# Altium PCB PCB4.PcbDoc (part 5 of 7)
Units mm, origin at the board's own origin, x right, y up, seen from the top; angles counter-clockwise.
Board outline 234.9 x 198.3 mm, 4 copper layers (Top Layer, Signal Layer 2, Mid, Bottom Layer), stack 3.052 mm thick; 410 components, 320 nets, 2032 pads, 297 vias.
Unrouted connection lines stored in the file: 1.
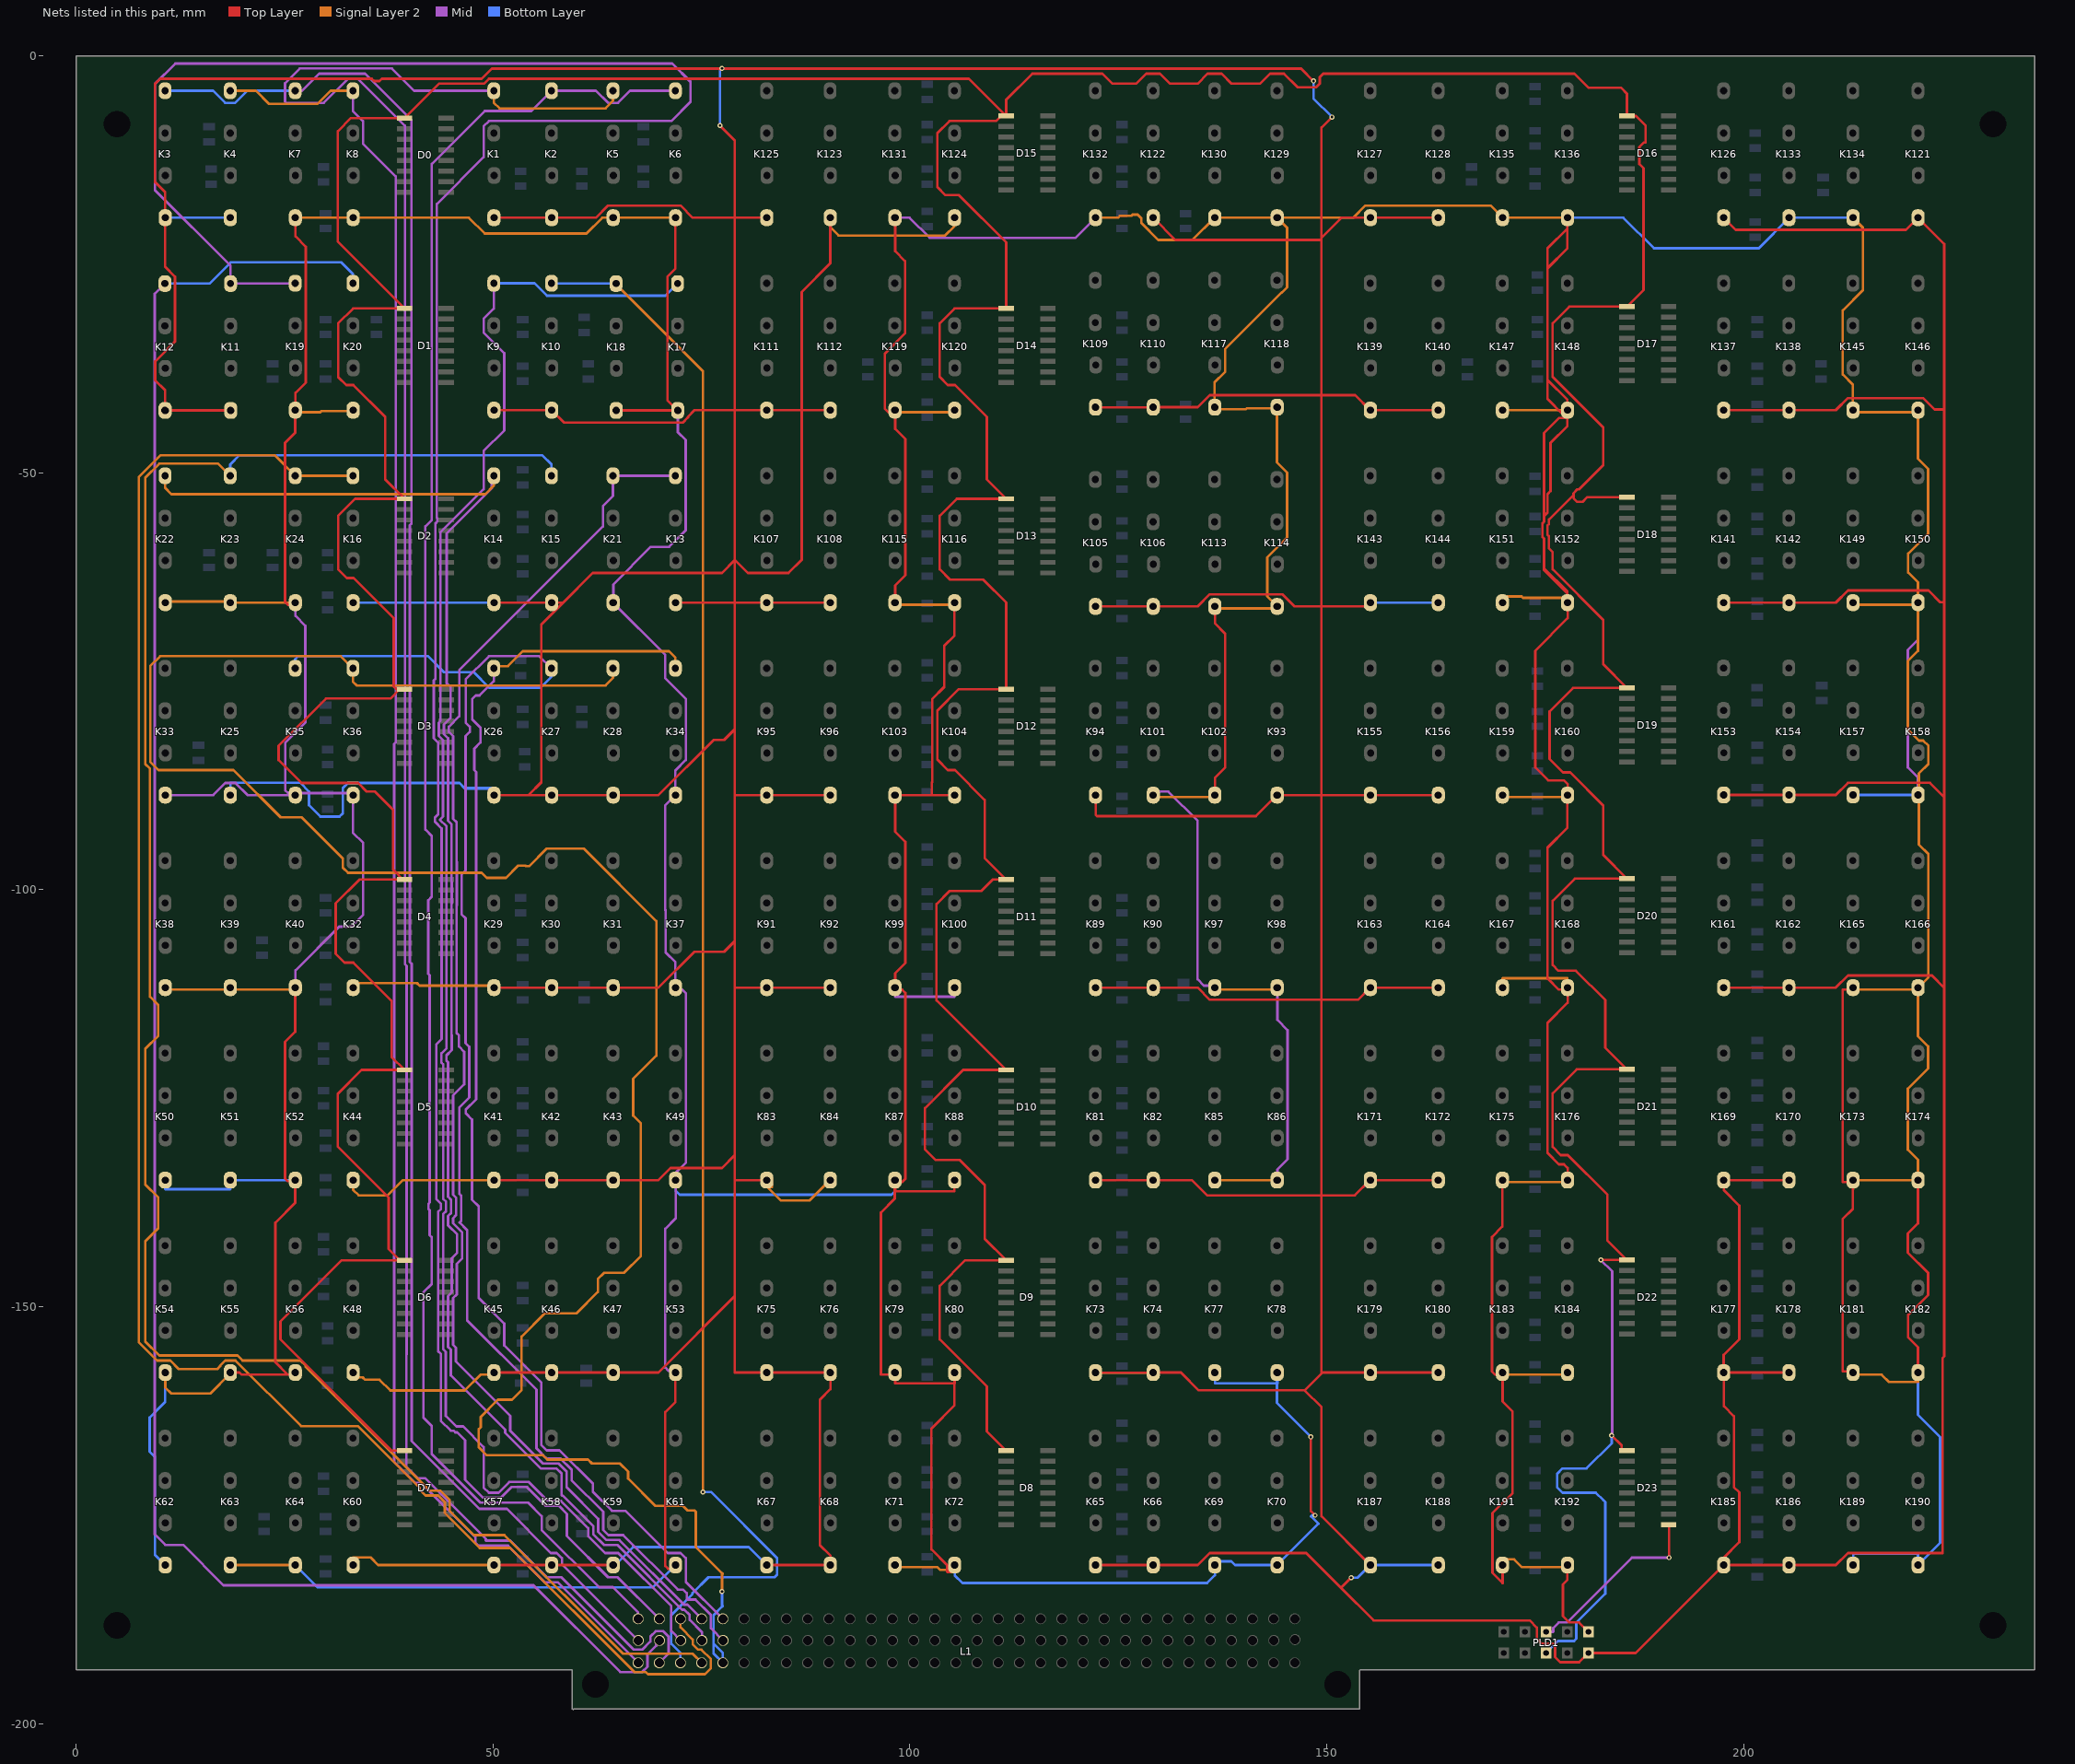
[diagram p7: the nets of this part, all layers, seen from the top]

## Via types
v1: diameter 0.6, hole 0.3, Top Layer to Bottom Layer, 292 vias
v2: diameter 0.7, hole 0.3, Top Layer to Bottom Layer, 5 vias

## Nets (pads, with @x,y where several pads share a name; then routed paths per layer and width w, separated by ;. In a path a pad name is that pad's centre, name@x,y a point inside that pad or via, vN(x,y) a via of type N, cw(c..) or ccw(c..) an arc to the next point about the centre after c; other vN are vias at no path point) (continued)
QS1(DATA): D23.9 PLD1.8 | length 22.7
  Top Layer w0.3: D23.9@190.966,-176.131 191.031,-176.131 v1(191.031,-180.068)
  Mid w0.3: PLD1.8@176.274,-188.958 177.137,-188.958 177.137,-188.501 177.798,-187.841 178.788,-187.841 186.561,-180.068 v1(191.031,-180.068)
STR: D0.1 D1.1 D2.1 D3.1 D4.1 D5.1 D6.1 D7.1 D8.1 D9.1 D10.1 D11.1 D12.1 D13.1 D14.1 D15.1 D16.1 D17.1 D18.1 D19.1 D20.1 D21.1 D22.1 D23.1 PLD1.3 | length 917.8
  Top Layer w0.3: D7.1@39.408,-167.241 37.853,-167.241 24.515,-153.903 24.515,-151.747 31.844,-144.418 D6.1@38.827,-144.418 ; D6.1@39.408,-144.418 D6.1@38.827,-144.418 ; D4.1@39.408,-98.77 D4.1@39.219,-98.77 ; D3.1@39.408,-75.947 D3.1@38.816,-75.947 ; D8.1@111.543,-167.241 109.218,-164.916 109.218,-159.548 103.572,-153.903 103.572,-147.475 106.63,-144.418 D9.1@111.543,-144.418 108.976,-141.85 108.976,-135.38 105.993,-132.397 103.071,-132.397 101.806,-131.132 101.806,-126.164 106.376,-121.594 D10.1@111.543,-121.594 103.192,-113.242 103.192,-101.701 104.753,-100.139 108.542,-100.139 109.911,-98.77 D11.1@111.543,-98.77 108.964,-96.19 108.964,-89.212 105.393,-85.642 104.544,-85.642 103.284,-84.381 103.284,-78.531 105.868,-75.947 D12.1@111.543,-75.947 111.543,-65.554 108.802,-62.812 104.793,-62.812 103.572,-61.592 103.572,-55.165 105.614,-53.123 D13.1@111.543,-53.123 109.218,-50.797 109.218,-43.311 105.393,-39.486 104.544,-39.486 103.572,-38.514 103.572,-32.087 105.36,-30.299 D14.1@111.543,-30.299 111.543,-22.374 105.881,-16.711 104.27,-16.711 103.284,-15.725 103.284,-9.298 104.753,-7.829 110.345,-7.829 110.952,-7.221 D15.1@111.543,-7.221 ; v1(182.852,-144.382) D22.1@185.966,-144.382 183.64,-142.056 183.64,-136.553 178.884,-131.797 178.035,-131.797 177.063,-130.825 177.063,-124.398 179.939,-121.521 D21.1@185.966,-121.521 183.386,-118.941 183.386,-113.221 179.863,-109.699 177.741,-109.699 177.063,-109.021 177.063,-101.32 179.721,-98.662 D20.1@185.966,-98.662 183.132,-95.828 183.132,-89.889 179.169,-85.926 178.32,-85.926 176.69,-84.296 176.69,-78.616 179.504,-75.801 D19.1@185.966,-75.801 183.132,-72.967 183.132,-67.66 177.063,-61.592 177.063,-59.503 176.629,-59.07 176.629,-57.62 176.448,-57.438 176.448,-56.319 176.629,-56.137 176.629,-55.598 179.569,-52.659 ; v1(184.148,-165.424) 185.341,-166.617 185.341,-167.241 D23.1@185.966,-167.241 ; D18.1@185.966,-52.942 181.195,-52.942 180.648,-53.488 180.027,-53.488 179.588,-53.049 179.588,-52.677 179.569,-52.659 ; D3.1@38.816,-75.947 37.701,-77.062 29.967,-77.062 24.29,-82.739 24.29,-84.444 27.042,-87.197 33.834,-87.197 34.85,-88.212 35.828,-88.212 38.033,-90.417 38.033,-97.584 D4.1@39.219,-98.77 ; D3.1@38.816,-75.947 38.415,-75.947 38.098,-75.629 38.098,-67.405 33.306,-62.613 32.457,-62.613 31.436,-61.592 31.436,-55.165 33.478,-53.123 D2.1@39.408,-53.123 37.082,-50.797 37.082,-43.311 33.257,-39.486 32.408,-39.486 31.436,-38.514 31.436,-32.087 33.224,-30.299 D1.1@39.408,-30.299 31.402,-22.293 31.402,-9.044 32.97,-7.475 D0.1@39.408,-7.475 43.535,-3.349 48.908,-3.349 49.508,-2.749 107.07,-2.749 D15.1@111.543,-7.221 ; D6.1@38.827,-144.418 37.492,-143.082 37.492,-136.881 31.402,-130.79 31.402,-124.432 34.24,-121.594 D5.1@39.408,-121.594 37.844,-120.03 37.844,-113.306 33.257,-108.719 32.194,-108.719 31.148,-107.673 31.148,-101.609 33.986,-98.77 D4.1@39.219,-98.77 ; D15.1@111.543,-7.221 111.543,-5.277 114.672,-2.149 123.075,-2.149 124.275,-3.349 127.117,-3.349 128.317,-2.149 129.996,-2.149 131.196,-3.349 134.491,-3.349 135.691,-2.149 137.37,-2.149 138.57,-3.349 141.976,-3.349 143.176,-2.149 144.855,-2.149 146.487,-3.781 148.7,-3.781 149.14,-3.341 149.14,-2.565 149.556,-2.149 179.675,-2.149 181.359,-3.833 185.244,-3.833 185.966,-4.554 D16.1@185.966,-7.221 187.069,-7.221 188.2,-8.353 188.2,-10.421 187.978,-10.421 187.462,-10.937 187.462,-12.993 187.958,-13.489 187.958,-28.09 D17.1@185.966,-30.082 179.068,-30.082 177.063,-32.087 177.063,-38.514 183.132,-44.583 183.132,-49.096 180.239,-51.988 180.027,-51.988 179.569,-52.446 179.569,-52.659
  Mid w0.3: v1(182.852,-144.382) 184.198,-145.728 184.198,-165.373 v1(184.148,-165.424)
  Bottom Layer w0.3: PLD1.3@176.274,-191.498 177.714,-190.059 179.65,-190.059 179.914,-189.795 179.914,-187.858 183.374,-184.398 183.374,-173.408 183.154,-173.188 182.238,-172.272 178.244,-172.272 177.623,-171.652 177.623,-169.993 178.244,-169.373 179.426,-169.373 181.128,-169.373 184.148,-166.352 v1(184.148,-165.424)
X1: K1.1 K2.1 K3.1 K4.1 K9.1 K10.1 K11.1 K12.1 K13.1 K14.1 K15.1 K16.1 K25.1 K26.1 K27.1 K28.1 K29.1 K30.1 K31.1 K32.1 K41.1 K42.1 K43.1 K44.1 K45.1 K46.1 K47.1 K48.1 K57.1 K58.1 K59.1 K60.1 K65.1 K66.1 K67.1 K68.1 K73.1 K74.1 K75.1 K76.1 K81.1 K82.1 K83.1 K84.1 K89.1 K90.1 K91.1 K92.1 K93.1 K94.1 K95.1 K96.1 K105.1 K106.1 K107.1 K108.1 K109.1 K110.1 K111.1 K112.1 K121.1 K122.1 K123.1 K124.1 K125.1 K126.1 K127.1 K128.1 K137.1 K138.1 K139.1 K140.1 K141.1 K142.1 K143.1 K144.1 K153.1 K154.1 K155.1 K156.1 K161.1 K162.1 K163.1 K164.1 K169.1 K170.1 K171.1 K172.1 K177.1 K178.1 K179.1 K180.1 K185.1 K186.1 K187.1 K188.1 PLD1.5 | length 1955.6
  Top Layer w0.3: K4.1@18.491,-19.413 18.491,-19.419 K4.1@18.531,-19.419 ; K11.1@18.58,-42.533 18.58,-42.781 18.54,-42.781 K11.1@18.54,-42.527 10.706,-42.527 K12.1@10.706,-42.533 K12.1@10.666,-42.527 10.681,-42.512 10.681,-40.11 9.494,-38.922 9.494,-36.643 11.878,-34.259 11.878,-26.483 10.681,-25.287 K3.1@10.681,-19.413 10.681,-16.36 9.469,-15.148 9.469,-3.369 10.09,-2.749 35.471,-2.749 35.755,-3.032 36.376,-3.032 36.66,-2.749 48.659,-2.749 49.859,-1.549 v1@77.172,-1.549 ; K60.1@33.208,-180.957 33.208,-180.963 K60.1@33.248,-180.963 ; K16.1@33.208,-65.569 33.208,-65.819 33.248,-65.819 K16.1@33.248,-65.574 ; K57.1@50.099,-180.957 50.099,-180.963 K57.1@50.139,-180.963 50.144,-180.957 K58.1@57.021,-180.957 57.021,-180.963 K58.1@57.061,-180.963 K59.1@64.435,-180.963 ; K26.1@50.099,-88.647 K26.1@50.099,-88.654 ; K45.1@50.139,-157.885 50.144,-157.88 K46.1@57.021,-157.88 ; K41.1@50.139,-134.807 K42.1@57.061,-134.807 K43.1@64.435,-134.807 69.833,-134.807 71.288,-133.352 77.468,-133.352 78.992,-131.828 ; K29.1@50.139,-111.729 50.144,-111.724 K30.1@57.021,-111.724 ; K14.1@50.139,-65.574 K15.1@57.061,-65.574 58.409,-65.574 ; K9.1@50.139,-42.496 K10.1@57.026,-42.496 ; K1.1@50.139,-19.419 50.144,-19.413 K2.1@57.021,-19.413 ; K10.1@57.021,-42.491 K10.1@57.026,-42.496 ; K2.1@57.061,-19.419 K2.1@57.021,-19.413 ; K47.1@64.435,-157.885 K47.1@64.435,-157.88 ; K31.1@64.435,-111.729 K31.1@64.395,-111.724 ; K28.1@64.435,-88.652 K28.1@64.395,-88.647 ; K13.1@71.92,-65.574 K13.1@71.879,-65.569 78.992,-65.569 ; v1(77.214,-8.364) 78.992,-10.142 78.992,-19.413 ; v1(77.468,-1.507) v1@77.468,-1.549 ; K67.1@82.817,-180.957 K68.1@90.422,-180.957 90.422,-180.963 K68.1@90.462,-180.963 90.462,-179.814 89.202,-178.555 89.202,-161.109 90.462,-159.85 K76.1@90.462,-157.885 ; K76.1@90.422,-157.88 82.857,-157.88 K75.1@82.857,-157.885 ; K84.1@90.422,-134.802 90.422,-134.807 K84.1@90.462,-134.807 ; K92.1@90.462,-111.729 90.422,-111.729 K92.1@90.422,-111.724 K91.1@82.817,-111.724 78.992,-111.724 ; K96.1@90.462,-88.652 90.422,-88.652 K96.1@90.422,-88.647 K95.1@82.817,-88.647 78.992,-88.647 ; K108.1@90.462,-65.574 90.422,-65.574 K108.1@90.422,-65.569 K107.1@82.817,-65.569 78.992,-65.569 ; K112.1@90.462,-42.496 90.422,-42.496 K112.1@90.422,-42.491 87.018,-42.491 ; K124.1@105.344,-19.413 105.344,-19.667 105.384,-19.667 K124.1@105.384,-19.419 ; K65.1@122.275,-180.963 129.151,-180.963 K66.1@129.157,-180.957 ; K73.1@122.275,-157.885 129.151,-157.885 K74.1@129.157,-157.88 ; K81.1@122.275,-134.807 129.151,-134.807 K82.1@129.157,-134.802 ; K89.1@122.275,-111.729 129.152,-111.729 K90.1@129.157,-111.724 ; K94.1@122.275,-88.652 122.275,-91.018 122.426,-91.168 141.494,-91.168 K93.1@144.016,-88.647 ; K105.1@122.275,-66.021 129.151,-66.021 K106.1@129.157,-66.015 ; K109.1@122.275,-42.145 129.152,-42.145 K110.1@129.157,-42.139 ; K122.1@129.157,-19.413 129.157,-19.667 129.197,-19.667 K122.1@129.197,-19.453 ; K66.1@129.197,-180.963 K66.1@129.157,-180.957 ; K74.1@129.197,-157.885 129.197,-157.88 132.495,-157.88 134.618,-160.002 147.318,-160.002 ; K82.1@129.197,-134.807 K82.1@129.157,-134.802 ; K90.1@129.197,-111.729 K90.1@129.157,-111.724 ; K106.1@129.197,-66.021 K106.1@129.157,-66.015 ; K110.1@129.197,-42.145 K110.1@129.157,-42.139 ; K93.1@144.056,-88.652 K93.1@144.016,-88.647 ; v1(148.39,-3.03) 146.908,-1.549 v1@77.468,-1.549 ; v1(150.62,-7.348) 149.35,-8.618 149.35,-21.826 ; v1(152.906,-182.471) 151.694,-183.683 ; K188.1@163.339,-180.957 163.339,-180.963 K188.1@163.379,-180.963 ; K144.1@163.339,-65.569 163.339,-65.574 K144.1@163.379,-65.574 ; K180.1@163.379,-157.885 163.339,-157.885 K180.1@163.339,-157.88 K179.1@155.191,-157.88 149.44,-157.88 149.35,-157.97 ; K172.1@163.379,-134.807 163.339,-134.807 K172.1@163.339,-134.802 K171.1@155.191,-134.802 153.359,-136.634 149.35,-136.634 ; K164.1@163.379,-111.729 163.339,-111.729 K164.1@163.339,-111.724 K163.1@155.191,-111.724 153.736,-113.179 149.35,-113.179 ; K156.1@163.379,-88.652 163.339,-88.652 K156.1@163.339,-88.647 K155.1@155.191,-88.647 K155.1@155.232,-88.652 155.191,-88.652 155.186,-88.647 149.35,-88.647 ; K140.1@163.379,-42.496 163.339,-42.496 K140.1@163.339,-42.491 K139.1@155.191,-42.491 153.39,-40.69 149.35,-40.69 ; K128.1@163.379,-19.419 163.339,-19.419 K128.1@163.339,-19.413 K127.1@155.192,-19.413 151.763,-19.413 149.35,-21.826 ; K169.1@197.567,-134.802 K170.1@205.377,-134.802 205.377,-134.807 K170.1@205.417,-134.807 ; K185.1@197.607,-180.963 K185.1@197.567,-180.957 ; K177.1@197.607,-157.885 197.607,-161.905 198.803,-163.101 198.803,-171.61 199.438,-172.245 199.438,-178.212 197.607,-180.043 K185.1@197.607,-180.957 ; K169.1@197.607,-134.807 197.607,-136.031 199.438,-137.863 199.438,-153.883 197.567,-155.755 K177.1@197.567,-157.88 K178.1@205.377,-157.88 205.377,-158.123 205.417,-158.123 K178.1@205.417,-157.885 ; K161.1@197.607,-111.729 K161.1@197.567,-111.724 K162.1@205.377,-111.724 ; K153.1@197.607,-88.626 K153.1@197.567,-88.621 K154.1@205.377,-88.621 ; K141.1@197.607,-65.574 K141.1@197.567,-65.569 K142.1@205.377,-65.569 ; K137.1@197.607,-42.496 K137.1@197.567,-42.491 K138.1@205.377,-42.491 ; K126.1@197.607,-19.419 197.589,-19.436 199.022,-20.869 219.418,-20.869 K121.1@220.873,-19.413 224.026,-22.566 224.026,-42.4 ; K162.1@205.417,-111.729 K162.1@205.377,-111.724 ; K154.1@205.417,-88.626 K154.1@205.377,-88.621 ; K142.1@205.417,-65.574 K142.1@205.377,-65.569 ; K138.1@205.417,-42.496 K138.1@205.377,-42.491 ; K26.1@50.099,-88.654 K26.1@50.139,-88.652 50.144,-88.647 K26.1@50.144,-88.654 ; K26.1@50.099,-88.654 K26.1@50.144,-88.654 ; K26.1@50.144,-88.654 54.252,-88.654 54.259,-88.647 ; 54.259,-88.647 K27.1@57.021,-88.647 K27.1@57.061,-88.652 57.061,-88.647 K28.1@64.395,-88.647 ; 54.259,-88.647 55.801,-87.104 55.801,-68.181 58.409,-65.574 ; K46.1@57.021,-157.88 57.021,-158.123 57.061,-158.123 K46.1@57.061,-157.885 ; K46.1@57.021,-157.88 K46.1@57.061,-157.885 ; K30.1@57.021,-111.724 57.021,-111.971 57.061,-111.971 K30.1@57.061,-111.729 ; K30.1@57.021,-111.724 K30.1@57.061,-111.729 ; K2.1@57.021,-19.413 62.353,-19.413 63.803,-17.964 72.506,-17.964 73.956,-19.413 78.992,-19.413 ; K10.1@57.026,-42.496 58.512,-43.983 72.765,-43.983 73.386,-43.362 73.386,-43.279 74.174,-42.491 78.992,-42.491 ; K46.1@57.061,-157.885 57.061,-157.88 K47.1@64.395,-157.88 K47.1@64.435,-157.88 ; K30.1@57.061,-111.729 57.061,-111.724 K31.1@64.395,-111.724 ; 58.409,-65.574 61.974,-62.009 77.468,-62.009 78.992,-60.485 ; K31.1@64.395,-111.724 69.838,-111.724 74.138,-107.424 77.722,-107.424 78.992,-106.154 ; K28.1@64.395,-88.647 69.838,-88.647 76.46,-82.024 77.722,-82.024 78.992,-80.754 ; K47.1@64.435,-157.88 69.838,-157.88 78.992,-148.726 ; v1@77.172,-1.549 77.214,-1.591 v1@77.256,-1.549 ; v1@77.172,-1.549 v1@77.256,-1.549 ; v1@77.256,-1.549 v1@77.468,-1.549 ; 78.992,-148.726 78.992,-134.802 ; 78.992,-148.726 78.992,-157.88 K75.1@82.817,-157.88 ; 78.992,-134.802 K83.1@82.817,-134.802 ; 78.992,-134.802 78.992,-131.828 ; 78.992,-131.828 78.992,-111.724 ; 78.992,-111.724 78.992,-106.154 ; 78.992,-106.154 78.992,-88.647 ; 78.992,-88.647 78.992,-80.754 ; 78.992,-80.754 78.992,-65.569 ; 78.992,-65.569 78.992,-60.485 ; 78.992,-60.485 79.017,-60.46 ; 78.992,-60.485 78.992,-60.46 ; 78.992,-60.46 79.017,-60.46 ; 78.992,-60.46 78.992,-60.434 ; 78.992,-60.434 78.992,-42.491 ; 78.992,-60.434 79.017,-60.46 ; 78.992,-42.491 K111.1@82.817,-42.491 ; 78.992,-42.491 78.992,-19.413 ; 78.992,-19.413 K125.1@82.817,-19.413 ; 79.017,-60.46 80.566,-62.009 85.443,-62.009 87.018,-60.434 87.018,-42.491 ; K75.1@82.817,-157.88 82.817,-157.885 K75.1@82.857,-157.885 ; K75.1@82.817,-157.88 K75.1@82.857,-157.885 ; K83.1@82.817,-134.802 82.817,-134.807 K83.1@82.857,-134.807 K83.1@82.817,-134.802 ; K111.1@82.817,-42.491 K111.1@82.857,-42.491 ; K111.1@82.817,-42.491 82.817,-42.731 82.857,-42.731 K111.1@82.857,-42.496 ; K111.1@82.817,-42.491 K111.1@82.857,-42.496 ; K125.1@82.817,-19.413 82.817,-19.667 82.857,-19.667 K125.1@82.857,-19.419 K125.1@82.817,-19.413 ; K111.1@82.857,-42.496 K111.1@82.857,-42.491 ; K111.1@82.857,-42.491 87.018,-42.491 ; 87.018,-42.491 87.018,-28.329 90.422,-24.925 ; 90.422,-24.925 K123.1@90.422,-19.413 K123.1@90.462,-19.419 90.462,-24.885 90.422,-24.925 ; K66.1@129.157,-180.957 134.489,-180.957 135.939,-179.508 147.518,-179.508 151.694,-183.683 ; K82.1@129.157,-134.802 133.801,-134.802 135.634,-136.634 149.35,-136.634 ; K90.1@129.157,-111.724 134.489,-111.724 135.944,-113.179 149.35,-113.179 ; K106.1@129.157,-66.015 134.489,-66.015 135.939,-64.566 144.642,-64.566 146.092,-66.015 149.35,-66.015 ; K110.1@129.157,-42.139 134.489,-42.139 135.939,-40.69 149.35,-40.69 ; K122.1@129.197,-19.453 129.179,-19.436 K122.1@129.197,-19.419 K122.1@129.197,-19.453 ; K122.1@129.197,-19.453 131.824,-22.08 149.35,-22.08 ; K93.1@144.016,-88.647 149.35,-88.647 ; 147.318,-160.002 149.35,-157.97 ; 147.318,-160.002 149.35,-162.034 149.35,-175.116 K187.1@155.191,-180.957 ; 149.35,-157.97 149.35,-136.634 ; 149.35,-136.634 149.35,-113.179 ; 149.35,-113.179 149.35,-88.647 ; 149.35,-88.647 149.35,-66.015 ; 149.35,-66.015 154.745,-66.015 K143.1@155.191,-65.569 ; 149.35,-66.015 149.35,-40.69 ; 149.35,-40.69 149.35,-22.08 ; 149.35,-22.08 149.35,-21.826 ; 151.694,-183.683 155.608,-187.596 ; 151.694,-183.683 155.608,-187.596 ; K187.1@155.191,-180.957 155.191,-180.963 K187.1@155.232,-180.963 K187.1@155.191,-180.957 ; K143.1@155.191,-65.569 155.191,-65.819 155.232,-65.819 K143.1@155.232,-65.574 K143.1@155.191,-65.569 ; 155.608,-187.596 174.308,-187.596 175.174,-188.462 175.174,-189.795 175.777,-190.398 177.11,-190.398 177.374,-190.662 177.374,-191.995 177.977,-192.599 180.254,-192.599 PLD1.5@181.354,-191.498 187.026,-191.498 K185.1@197.567,-180.957 ; K185.1@197.567,-180.957 K185.1@197.607,-180.957 ; K185.1@197.607,-180.957 K186.1@205.377,-180.957 211.022,-180.957 212.472,-179.508 223.825,-179.508 223.825,-156.14 224.026,-155.938 224.026,-111.742 ; K162.1@205.377,-111.724 211.022,-111.724 212.472,-110.274 222.557,-110.274 224.026,-111.742 ; K154.1@205.377,-88.621 211.022,-88.621 212.472,-87.172 222.314,-87.172 224.026,-88.882 ; K142.1@205.377,-65.569 211.022,-65.569 212.472,-64.119 222.122,-64.119 223.518,-65.514 224.026,-65.514 ; K138.1@205.377,-42.491 211.022,-42.491 212.472,-41.041 221.499,-41.041 222.859,-42.4 224.026,-42.4 ; 224.026,-111.742 224.026,-88.882 ; 224.026,-88.882 224.026,-65.514 ; 224.026,-65.514 224.026,-42.4
  Signal Layer 2 w0.3: K12.1@10.666,-42.527 10.671,-42.533 K12.1@10.706,-42.533 ; K3.1@10.681,-19.413 10.686,-19.419 K3.1@10.721,-19.419 ; K16.1@33.208,-65.569 33.213,-65.574 K16.1@33.248,-65.574 ; K60.1@33.248,-180.963 33.248,-180.043 35.329,-180.043 36.243,-180.957 K57.1@50.099,-180.957 ; K44.1@33.248,-134.807 33.248,-135.999 33.883,-136.634 37.361,-136.634 39.19,-134.806 50.099,-134.806 K41.1@50.099,-134.802 ; K48.1@33.248,-157.885 K48.1@33.248,-158.282 ; K32.1@33.248,-111.729 33.248,-111.184 40.892,-111.184 41.196,-111.488 50.099,-111.488 K29.1@50.099,-111.724 ; K45.1@50.099,-157.88 50.099,-158.123 48.512,-158.123 46.607,-160.028 37.701,-160.028 36.408,-158.735 34.664,-158.735 34.376,-158.447 K48.1@33.879,-158.447 ; K46.1@57.021,-157.88 57.026,-157.885 K46.1@57.061,-157.885 ; K30.1@57.021,-111.724 57.026,-111.729 K30.1@57.061,-111.729 ; K27.1@57.021,-88.647 57.026,-88.652 K27.1@57.061,-88.652 ; K59.1@64.395,-180.957 64.4,-180.963 K59.1@64.435,-180.963 ; K67.1@82.817,-180.957 82.822,-180.963 K67.1@82.857,-180.963 ; K75.1@82.817,-157.88 82.822,-157.885 K75.1@82.857,-157.885 ; K83.1@82.817,-134.802 82.822,-134.807 K83.1@82.857,-134.807 ; K91.1@82.817,-111.724 82.822,-111.729 K91.1@82.857,-111.729 ; K107.1@82.817,-65.569 82.822,-65.574 K107.1@82.857,-65.574 ; K125.1@82.817,-19.413 82.822,-19.419 K125.1@82.857,-19.419 ; K83.1@83.469,-134.61 83.469,-135.657 82.927,-135.657 84.504,-137.234 87.989,-137.234 K84.1@90.422,-134.802 ; K123.1@90.462,-19.419 90.462,-20.571 ; K124.1@105.344,-19.413 105.344,-20.429 104.226,-21.547 91.438,-21.547 90.5,-20.609 ; K65.1@122.235,-180.957 122.235,-181.211 122.275,-181.211 K65.1@122.275,-180.963 ; K73.1@122.235,-157.88 K73.1@122.235,-157.885 ; K81.1@122.235,-134.802 122.235,-135.034 122.275,-135.034 K81.1@122.275,-134.807 ; K89.1@122.235,-111.724 122.235,-111.971 122.275,-111.971 K89.1@122.275,-111.729 ; K74.1@129.157,-157.88 K74.1@129.197,-157.885 K73.1@122.275,-157.885 ; K187.1@155.191,-180.957 155.197,-180.963 K187.1@155.232,-180.963 ; K179.1@155.191,-157.88 155.197,-157.885 K179.1@155.232,-157.885 ; K171.1@155.191,-134.802 155.197,-134.807 K171.1@155.232,-134.807 ; K163.1@155.191,-111.724 155.197,-111.729 K163.1@155.232,-111.729 ; K155.1@155.191,-88.647 155.196,-88.652 K155.1@155.232,-88.652 ; K143.1@155.191,-65.569 155.197,-65.574 K143.1@155.232,-65.574 ; K139.1@155.191,-42.491 155.197,-42.496 K139.1@155.232,-42.496 ; K127.1@155.192,-19.413 155.197,-19.419 K127.1@155.232,-19.419 ; K153.1@197.567,-88.621 197.584,-88.621 197.589,-88.626 K153.1@197.607,-88.626 ; K141.1@197.567,-65.569 197.584,-65.569 197.589,-65.574 K141.1@197.607,-65.574 ; K137.1@197.567,-42.491 197.584,-42.491 197.589,-42.496 K137.1@197.607,-42.496 ; K138.1@205.377,-42.491 205.382,-42.491 205.387,-42.496 K138.1@205.417,-42.496 ; K48.1@33.248,-158.282 K48.1@33.413,-158.447 ; K48.1@33.248,-158.282 33.248,-158.447 K48.1@33.413,-158.447 ; K48.1@33.413,-158.447 33.646,-158.68 33.827,-158.499 33.844,-158.481 K48.1@33.879,-158.447 ; K48.1@33.413,-158.447 K48.1@33.879,-158.447 ; 90.462,-20.571 90.5,-20.609 ; 90.462,-20.571 90.462,-20.647 90.5,-20.609 ; K73.1@122.235,-157.885 K73.1@122.275,-157.885 ; K73.1@122.235,-157.885 122.235,-158.123 122.275,-158.123 K73.1@122.275,-157.885
  Bottom Layer w0.3: K3.1@10.681,-19.413 K4.1@18.491,-19.413 ; K25.1@18.531,-88.652 18.531,-87.155 26.871,-87.155 27.938,-88.221 27.938,-89.859 29.299,-91.221 31.604,-91.221 31.996,-90.828 31.996,-87.817 32.617,-87.197 33.259,-87.197 ; K16.1@33.208,-65.569 K14.1@50.099,-65.569 50.134,-65.569 K14.1@50.139,-65.574 ; K26.1@50.099,-88.647 50.099,-87.797 K26.1@49.756,-87.797 ; K59.1@64.395,-180.957 64.641,-180.957 66.8,-178.798 80.658,-178.798 K67.1@82.817,-180.957 ; v1(77.214,-8.364) 77.214,-1.761 v1(77.468,-1.507) ; v1(148.39,-3.03) 148.39,-5.119 v1(150.62,-7.348) ; v1(152.906,-182.471) 153.677,-182.471 K187.1@155.191,-180.957 K188.1@163.339,-180.957 ; K143.1@155.191,-65.569 K144.1@163.339,-65.569 ; 33.259,-87.197 33.3,-87.155 45.936,-87.155 45.977,-87.197 ; 33.259,-87.197 45.977,-87.197 ; 45.977,-87.197 46.577,-87.797 ; 46.577,-87.797 K26.1@49.756,-87.797 ; 46.577,-87.797 46.648,-87.868 49.685,-87.868 K26.1@49.756,-87.797
  other v1: 77.214,-8.365
X2: K5.1 K6.1 K7.1 K8.1 K17.1 K18.1 K19.1 K20.1 K21.1 K22.1 K23.1 K24.1 K33.1 K34.1 K35.1 K36.1 K37.1 K38.1 K39.1 K40.1 K49.1 K50.1 K51.1 K52.1 K53.1 K54.1 K55.1 K56.1 K61.1 K62.1 K63.1 K64.1 K69.1 K70.1 K71.1 K72.1 K77.1 K78.1 K79.1 K80.1 K85.1 K86.1 K87.1 K88.1 K97.1 K98.1 K99.1 K100.1 K101.1 K102.1 K103.1 K104.1 K113.1 K114.1 K115.1 K116.1 K117.1 K118.1 K119.1 K120.1 K129.1 K130.1 K131.1 K132.1 K133.1 K134.1 K135.1 K136.1 K145.1 K146.1 K147.1 K148.1 K149.1 K150.1 K151.1 K152.1 K157.1 K158.1 K159.1 K160.1 K165.1 K166.1 K167.1 K168.1 K173.1 K174.1 K175.1 K176.1 K181.1 K182.1 K183.1 K184.1 K189.1 K190.1 K191.1 K192.1 PLD1.6 | length 1807
  Top Layer w0.3: K38.1@10.681,-111.724 10.681,-111.742 10.721,-111.742 K38.1@10.721,-111.729 ; K55.1@18.531,-157.885 18.531,-157.869 19.606,-157.869 19.86,-158.123 25.398,-158.123 ; K56.1@26.287,-157.88 K56.1@26.287,-157.885 ; K52.1@26.287,-134.802 K52.1@26.287,-134.933 ; K40.1@26.287,-111.724 26.287,-117.026 25.067,-118.245 25.067,-134.602 25.398,-134.933 K52.1@26.287,-134.933 ; K24.1@26.287,-65.569 26.287,-65.819 25.398,-65.819 25.067,-65.489 25.067,-46.414 26.287,-45.194 K19.1@26.287,-42.731 ; K19.1@26.287,-42.491 K19.1@26.287,-42.731 ; K7.1@26.327,-19.419 26.327,-21.663 27.557,-22.893 27.557,-39.189 26.327,-40.419 K19.1@26.327,-42.496 26.327,-42.731 K19.1@26.287,-42.731 ; K56.1@26.327,-157.885 K56.1@26.287,-157.885 ; K18.1@64.768,-42.527 K17.1@72.133,-42.527 70.921,-41.315 70.921,-26.483 71.879,-25.525 K6.1@71.879,-19.413 ; K61.1@71.88,-180.957 71.88,-181.415 70.991,-181.415 70.66,-181.084 70.66,-162.619 71.88,-161.399 K53.1@71.88,-157.88 ; K79.1@98.183,-157.88 98.183,-158.123 96.518,-158.123 96.518,-138.692 98.183,-137.026 K87.1@98.183,-134.802 ; K103.1@98.183,-88.647 102.614,-88.647 ; K79.1@98.223,-157.885 98.223,-159.177 105.344,-159.177 ; K87.1@98.223,-134.807 K87.1@98.223,-135.034 ; K103.1@98.223,-88.652 98.223,-93.023 99.439,-94.238 99.439,-108.774 98.223,-109.99 K99.1@98.223,-111.729 98.223,-111.971 99.058,-111.971 99.439,-112.352 99.439,-134.653 99.058,-135.034 K87.1@98.223,-135.034 ; K115.1@98.223,-65.574 98.223,-63.508 99.439,-62.292 99.439,-45.956 98.223,-44.741 K119.1@98.223,-42.731 ; K119.1@98.223,-42.496 K119.1@98.223,-42.731 ; K131.1@98.223,-19.419 98.223,-23.427 99.413,-24.617 99.413,-33.282 97,-35.695 97,-42.337 97.394,-42.731 K119.1@98.223,-42.731 ; K72.1@105.344,-180.957 105.344,-181.77 104.468,-181.77 104.468,-180.983 102.573,-179.088 102.573,-164.577 105.344,-161.806 105.344,-159.177 ; K80.1@105.344,-157.88 105.344,-159.177 ; K88.1@105.344,-134.802 105.344,-136.152 98.223,-136.152 K87.1@98.223,-135.034 ; K104.1@105.344,-88.647 102.614,-88.647 ; K116.1@105.344,-65.569 105.344,-69.502 104.112,-70.734 104.112,-75.674 102.664,-77.122 102.664,-87.104 102.614,-87.155 102.614,-88.647 ; K80.1@105.384,-157.885 105.384,-159.177 105.344,-159.177 ; K102.1@136.571,-88.652 136.571,-86.571 137.793,-85.349 137.793,-69.274 136.571,-68.052 K113.1@136.571,-66.021 ; v1(148.08,-165.591) 148.08,-174.481 v1(148.588,-174.989) ; K183.1@171.025,-157.88 171.025,-158.123 170.178,-158.123 169.797,-157.742 169.797,-141.613 171.025,-140.384 K175.1@171.025,-134.802 ; K191.1@171.065,-180.963 171.065,-183.118 169.847,-181.9 169.847,-174.734 172.26,-172.321 172.26,-162.544 171.065,-161.349 K183.1@171.065,-157.885 ; K192.1@178.835,-180.957 178.835,-182.735 178.306,-183.265 178.306,-187.079 179.068,-187.841 180.236,-187.841 PLD1.6@181.354,-188.958 ; K168.1@178.835,-111.724 178.835,-111.971 177.798,-111.971 176.451,-110.625 176.451,-94.949 178.835,-92.565 K160.1@178.835,-88.647 ; K152.1@178.835,-65.569 178.835,-64.495 ; K136.1@178.835,-19.413 178.835,-20.683 ; K176.1@178.875,-134.807 178.875,-133.343 178.433,-132.901 177.798,-132.901 176.451,-131.554 176.451,-115.944 178.875,-113.52 K168.1@178.875,-111.729 ; K160.1@178.875,-88.652 178.875,-87.318 178.433,-86.876 176.528,-86.876 174.978,-85.326 174.978,-71.342 178.875,-67.445 K152.1@178.875,-65.574 ; K181.1@213.063,-157.88 213.063,-157.742 211.834,-157.742 211.834,-139.49 213.063,-138.26 K173.1@213.063,-135.034 ; K173.1@213.063,-134.802 K173.1@213.063,-135.034 ; K165.1@213.063,-111.724 213.063,-111.971 211.834,-111.971 211.834,-135.034 K173.1@213.063,-135.034 ; K182.1@220.873,-157.88 220.873,-154.826 219.701,-153.654 219.701,-150.958 222.085,-148.574 222.085,-145.918 219.661,-143.494 219.661,-141.215 220.873,-140.003 K174.1@220.873,-134.802 ; 25.398,-158.123 26.287,-158.123 K56.1@26.287,-157.885 ; 25.398,-158.123 23.899,-156.624 23.899,-139.911 26.287,-137.523 K52.1@26.287,-134.933 ; 176.029,-61.439 178.835,-64.244 178.835,-64.495 ; 176.029,-61.439 176.029,-61.689 178.835,-64.495 ; 176.029,-61.439 176.029,-57.868 175.848,-57.686 175.848,-56.071 176.029,-55.889 176.029,-55.196 ; 176.029,-55.196 176.451,-54.774 176.451,-52.56 176.807,-52.205 176.807,-46.414 178.835,-44.386 K148.1@178.835,-43.442 ; 176.029,-55.196 176.029,-45.235 177.823,-43.442 K148.1@178.835,-43.442 ; 176.451,-38.87 176.451,-25.48 ; 176.451,-38.87 178.835,-41.254 K148.1@178.835,-42.491 K148.1@178.835,-42.959 ; 176.451,-38.87 176.451,-41.156 178.255,-42.959 K148.1@178.835,-42.959 ; 176.451,-25.48 178.835,-23.096 178.835,-20.683 ; 176.451,-25.48 176.451,-23.067 178.835,-20.683 ; K148.1@178.835,-43.442 K148.1@178.835,-42.959
  Mid w0.3: K33.1@10.681,-88.647 16.45,-88.647 17.9,-87.197 19.117,-87.197 20.567,-88.647 K35.1@26.287,-88.647 26.287,-88.4 25.436,-88.4 25.093,-88.057 25.093,-82.38 27.506,-79.967 27.506,-68.345 26.327,-67.165 K24.1@26.327,-65.574 ; K35.1@26.327,-88.652 26.327,-88.4 33.208,-88.4 K36.1@33.208,-88.647 33.208,-93.137 34.44,-94.369 34.44,-103.005 33.018,-104.427 31.559,-104.427 26.327,-109.66 K40.1@26.327,-111.729 ; K21.1@64.395,-65.569 70.668,-71.842 70.668,-74.638 73.132,-77.102 73.132,-84.421 71.88,-85.673 K34.1@71.88,-88.647 70.668,-89.859 70.668,-102.419 70.708,-102.459 70.708,-107.499 71.88,-108.671 K37.1@71.88,-111.724 ; K21.1@64.435,-65.574 64.435,-63.384 68.933,-58.885 71.118,-58.885 73.099,-56.904 73.099,-46.069 72.174,-45.144 K17.1@72.174,-42.533 ; K53.1@71.88,-157.88 71.88,-157.64 71.029,-157.64 70.66,-157.272 70.66,-140.648 71.92,-139.389 K49.1@71.92,-134.807 71.92,-133.917 73.15,-132.687 73.15,-112.416 72.705,-111.971 71.92,-111.971 K37.1@71.92,-111.729 ; K131.1@98.183,-19.413 K131.1@98.223,-19.413 ; K99.1@98.223,-111.729 98.223,-112.822 105.344,-112.822 K100.1@105.344,-111.724 ; K131.1@98.223,-19.419 K131.1@98.223,-19.413 ; K132.1@122.275,-19.419 119.867,-21.826 102.36,-21.826 99.947,-19.413 K131.1@98.223,-19.413 ; K101.1@129.197,-88.652 129.197,-88.222 130.985,-88.222 134.491,-91.727 134.491,-110.726 135.253,-111.488 136.531,-111.488 K97.1@136.531,-111.724 ; K86.1@144.056,-134.807 144.056,-133.536 145.286,-132.306 145.286,-116.822 144.056,-115.592 K98.1@144.056,-111.729 ; K158.1@220.873,-88.621 220.873,-86.546 219.657,-85.329 219.657,-71.255 220.873,-70.039 K150.1@220.873,-65.569
  Signal Layer 2 w0.3: K62.1@10.681,-180.957 10.686,-180.963 K62.1@10.721,-180.963 K62.1@10.721,-181.084 ; K54.1@10.681,-157.88 10.686,-157.885 K54.1@10.721,-157.885 10.721,-159.677 11.428,-160.383 16.103,-160.383 18.491,-157.996 K55.1@18.491,-157.885 ; K50.1@10.681,-134.802 10.686,-134.807 K50.1@10.721,-134.807 ; K38.1@10.681,-111.724 10.686,-111.729 K38.1@10.721,-111.729 10.721,-111.971 18.491,-111.971 K39.1@18.491,-111.729 ; K33.1@10.681,-88.647 10.686,-88.652 K33.1@10.721,-88.652 ; K22.1@10.681,-65.569 10.686,-65.574 K22.1@10.721,-65.574 10.721,-65.438 18.491,-65.438 K23.1@18.491,-65.569 K24.1@26.287,-65.569 ; K63.1@18.491,-181.084 K63.1@18.491,-180.963 ; K55.1@18.491,-157.88 K55.1@18.491,-157.885 ; K51.1@18.491,-134.802 18.491,-134.807 K51.1@18.531,-134.807 ; K39.1@18.491,-111.724 K39.1@18.491,-111.729 ; K63.1@18.531,-181.186 K63.1@18.531,-180.963 K63.1@18.491,-180.963 ; K55.1@18.531,-157.885 K55.1@18.491,-157.885 ; K64.1@26.287,-181.186 K64.1@26.287,-180.963 ; K56.1@26.287,-157.88 26.292,-157.885 K56.1@26.327,-157.885 ; K52.1@26.287,-134.802 26.292,-134.807 K52.1@26.327,-134.807 ; 26.287,-112.822 K40.1@26.287,-111.971 ; K35.1@26.287,-88.647 26.292,-88.652 K35.1@26.327,-88.652 ; K19.1@26.287,-42.491 26.292,-42.496 K19.1@26.327,-42.496 26.327,-42.731 29.309,-42.731 29.436,-42.604 33.208,-42.604 K20.1@33.208,-42.496 ; K7.1@26.287,-19.413 K8.1@33.208,-19.413 ; K64.1@26.327,-180.963 K64.1@26.287,-180.963 ; K40.1@26.327,-111.729 26.292,-111.729 K40.1@26.287,-111.724 K40.1@26.287,-111.971 ; K36.1@33.208,-88.647 33.213,-88.652 K36.1@33.248,-88.652 ; K20.1@33.248,-42.496 K20.1@33.213,-42.496 ; K8.1@33.248,-19.419 33.213,-19.419 K8.1@33.208,-19.413 ; K21.1@64.395,-65.569 64.4,-65.574 K21.1@64.435,-65.574 ; K5.1@64.435,-19.419 64.4,-19.419 K5.1@64.395,-19.413 ; K18.1@64.768,-42.527 64.773,-42.533 K18.1@64.808,-42.533 K18.1@64.808,-42.756 ; K61.1@71.88,-180.957 71.885,-180.963 K61.1@71.92,-180.963 ; K53.1@71.88,-157.88 71.885,-157.885 K53.1@71.92,-157.885 ; K49.1@71.879,-134.802 71.885,-134.807 K49.1@71.92,-134.807 ; K37.1@71.88,-111.724 71.885,-111.729 K37.1@71.92,-111.729 ; K34.1@71.88,-88.647 71.885,-88.652 K34.1@71.92,-88.652 ; K6.1@71.919,-19.419 71.885,-19.419 K6.1@71.879,-19.413 K5.1@64.395,-19.413 ; K17.1@72.133,-42.756 K17.1@72.133,-42.533 ; K17.1@72.133,-42.527 K17.1@72.133,-42.533 ; K17.1@72.174,-42.533 K17.1@72.133,-42.533 ; K71.1@98.183,-180.957 98.188,-180.963 K71.1@98.223,-180.963 98.223,-181.211 103.299,-181.211 103.63,-181.542 104.341,-181.542 104.442,-181.643 105.344,-181.643 K72.1@105.344,-180.957 105.349,-180.963 K72.1@105.384,-180.963 ; K79.1@98.183,-157.88 98.188,-157.885 K79.1@98.223,-157.885 ; K87.1@98.183,-134.802 98.188,-134.807 K87.1@98.223,-134.807 ; K99.1@98.183,-111.724 98.188,-111.729 K99.1@98.223,-111.729 ; K103.1@98.183,-88.647 98.188,-88.652 K103.1@98.223,-88.652 ; K115.1@98.183,-65.569 98.188,-65.574 K115.1@98.223,-65.574 98.223,-65.819 105.344,-65.819 K116.1@105.344,-65.574 ; K119.1@98.183,-42.491 98.188,-42.496 K119.1@98.223,-42.496 98.223,-42.731 105.344,-42.731 K120.1@105.344,-42.496 ; K80.1@105.344,-157.88 105.349,-157.885 K80.1@105.384,-157.885 ; K88.1@105.344,-134.802 105.349,-134.807 K88.1@105.384,-134.807 ; K100.1@105.344,-111.724 105.349,-111.729 K100.1@105.384,-111.729 ; K104.1@105.344,-88.647 105.349,-88.652 K104.1@105.384,-88.652 ; K116.1@105.384,-65.574 K116.1@105.349,-65.574 ; K120.1@105.384,-42.496 K120.1@105.349,-42.496 ; K132.1@122.235,-19.413 122.24,-19.419 K132.1@122.275,-19.419 124.95,-19.419 125.174,-19.194 126.537,-19.194 126.687,-19.044 127.308,-19.044 127.748,-19.484 127.748,-20.046 129.782,-22.08 133.864,-22.08 K130.1@136.531,-19.413 ; K101.1@129.157,-88.647 129.162,-88.652 K101.1@129.197,-88.652 129.197,-88.882 136.531,-88.882 K102.1@136.531,-88.647 136.536,-88.652 K102.1@136.571,-88.652 ; K69.1@136.531,-180.957 136.536,-180.963 K69.1@136.571,-180.963 ; K77.1@136.531,-157.88 136.536,-157.885 K77.1@136.571,-157.885 ; K85.1@136.531,-134.802 136.536,-134.807 K85.1@136.571,-134.807 136.571,-134.806 144.016,-134.806 K86.1@144.016,-134.802 144.021,-134.807 K86.1@144.056,-134.807 ; K97.1@136.531,-111.724 136.536,-111.729 K97.1@136.571,-111.729 136.571,-111.971 144.015,-111.971 K98.1@144.015,-111.729 ; K113.1@136.531,-66.015 136.536,-66.021 K113.1@136.571,-66.021 136.571,-66.251 144.015,-66.251 K114.1@144.015,-66.021 ; K130.1@136.571,-19.419 136.536,-19.419 K130.1@136.531,-19.413 ; K70.1@144.016,-180.957 144.021,-180.963 K70.1@144.056,-180.963 ; K78.1@144.016,-157.88 144.021,-157.885 K78.1@144.056,-157.885 ; K98.1@144.015,-111.724 K98.1@144.015,-111.729 ; K98.1@144.056,-111.729 K98.1@144.015,-111.729 ; K114.1@144.056,-66.021 K114.1@144.015,-66.021 ; K118.1@144.056,-42.145 144.021,-42.145 K118.1@144.016,-42.139 K118.1@144.016,-42.273 ; K191.1@171.025,-180.957 171.03,-180.963 K191.1@171.065,-180.963 171.065,-180.272 172.438,-180.272 173.353,-181.186 178.835,-181.186 K192.1@178.835,-180.963 ; K183.1@171.025,-157.88 171.03,-157.885 K183.1@171.065,-157.885 171.065,-158.123 178.835,-158.123 K184.1@178.835,-157.88 178.84,-157.885 K184.1@178.875,-157.885 ; K175.1@171.025,-134.802 171.03,-134.807 K175.1@171.065,-134.807 171.065,-135.034 178.835,-135.034 K176.1@178.835,-134.802 178.84,-134.807 K176.1@178.875,-134.807 ; K167.1@171.025,-111.724 171.03,-111.729 K167.1@171.065,-111.729 ; K159.1@171.025,-88.647 171.03,-88.652 K159.1@171.065,-88.652 171.065,-88.882 178.835,-88.882 K160.1@178.835,-88.652 ; K151.1@171.025,-65.569 171.03,-65.574 K151.1@171.065,-65.574 171.065,-64.829 173.353,-64.829 173.505,-64.981 178.835,-64.981 K152.1@178.835,-65.569 178.84,-65.574 K152.1@178.875,-65.574 ; K147.1@171.025,-42.491 171.03,-42.496 K147.1@171.065,-42.496 171.065,-42.502 178.835,-42.502 K148.1@178.835,-42.496 ; K135.1@171.025,-19.413 171.03,-19.419 K135.1@171.065,-19.419 ; K167.1@171.065,-111.971 K167.1@171.065,-111.729 ; K168.1@178.835,-111.971 K168.1@178.835,-111.724 ; K192.1@178.875,-180.963 K192.1@178.84,-180.963 ; K168.1@178.875,-111.729 178.84,-111.729 K168.1@178.835,-111.724 ; K160.1@178.875,-88.652 K160.1@178.84,-88.652 ; K148.1@178.875,-42.496 K148.1@178.84,-42.496 ; K136.1@178.875,-19.419 178.84,-19.419 K136.1@178.835,-19.413 178.83,-19.419 K135.1@171.065,-19.419 ; K133.1@205.377,-19.413 205.382,-19.419 K133.1@205.417,-19.419 ; K189.1@213.063,-180.957 213.068,-180.963 K189.1@213.103,-180.963 ; K181.1@213.063,-157.88 213.068,-157.885 K181.1@213.103,-157.885 213.103,-158.123 216.533,-158.123 217.424,-159.015 220.873,-159.015 K182.1@220.873,-157.88 220.878,-157.885 K182.1@220.913,-157.885 ; K165.1@213.063,-111.724 213.068,-111.729 K165.1@213.103,-111.729 213.103,-111.971 K166.1@220.873,-111.971 ; K157.1@213.063,-88.621 213.068,-88.626 K157.1@213.103,-88.626 ; K149.1@213.063,-65.569 213.068,-65.574 K149.1@213.103,-65.574 213.103,-65.819 K150.1@220.873,-65.819 ; K134.1@213.063,-19.413 214.275,-20.625 214.275,-28.106 211.851,-30.53 211.851,-38.225 213.063,-39.437 K145.1@213.063,-42.491 213.068,-42.496 K145.1@213.103,-42.496 213.103,-42.731 K146.1@220.873,-42.731 ; 213.103,-135.847 K173.1@213.103,-134.807 213.068,-134.807 K173.1@213.063,-134.802 K174.1@220.873,-134.802 ; K190.1@220.873,-180.957 220.878,-180.963 K190.1@220.913,-180.963 ; 220.873,-135.847 K174.1@220.873,-134.802 ; K158.1@220.873,-88.621 220.878,-88.626 K158.1@220.913,-88.626 ; K146.1@220.873,-42.491 K146.1@220.873,-42.731 ; K166.1@220.913,-111.729 K166.1@220.878,-111.729 ; K63.1@18.491,-180.963 K63.1@18.491,-180.957 K64.1@26.287,-180.957 K64.1@26.287,-180.963 ; K39.1@18.491,-111.729 K39.1@18.531,-111.729 18.531,-111.971 K40.1@26.287,-111.971 ; K20.1@33.208,-42.496 K20.1@33.213,-42.496 ; K20.1@33.208,-42.496 K20.1@33.208,-42.491 K20.1@33.213,-42.496 ; K8.1@33.208,-19.413 47.115,-19.413 49.02,-21.318 61.212,-21.318 63.117,-19.413 K5.1@64.395,-19.413 ; K116.1@105.344,-65.574 K116.1@105.344,-65.569 K116.1@105.349,-65.574 ; K116.1@105.344,-65.574 K116.1@105.349,-65.574 ; K120.1@105.344,-42.496 K120.1@105.349,-42.496 ; K120.1@105.344,-42.496 K120.1@105.344,-42.491 K120.1@105.349,-42.496 ; K130.1@136.531,-19.413 K129.1@144.015,-19.413 ; K114.1@144.015,-66.021 K114.1@144.015,-66.015 144.05,-66.015 142.844,-64.809 142.844,-60.131 145.227,-57.747 145.227,-49.971 144.016,-48.759 K118.1@144.016,-42.273 ; K118.1@144.016,-42.273 140.383,-42.273 140.282,-42.375 136.571,-42.375 K117.1@136.571,-42.145 136.536,-42.145 K117.1@136.531,-42.139 136.531,-39.166 137.783,-37.914 137.783,-35.171 144.58,-28.374 144.607,-28.374 145.228,-27.754 145.228,-20.626 K129.1@144.015,-19.413 ; K129.1@144.015,-19.413 153.15,-19.413 154.6,-17.963 155.783,-17.963 169.61,-17.964 K135.1@171.065,-19.419 ; K167.1@171.065,-111.729 171.065,-110.599 178.835,-110.599 K168.1@178.835,-111.724 ; K192.1@178.835,-180.963 K192.1@178.84,-180.963 ; K192.1@178.835,-180.963 K192.1@178.835,-180.957 K192.1@178.84,-180.963 ; K160.1@178.835,-88.652 K160.1@178.84,-88.652 ; K160.1@178.835,-88.652 K160.1@178.835,-88.647 K160.1@178.84,-88.652 ; K148.1@178.835,-42.496 K148.1@178.84,-42.496 ; K148.1@178.835,-42.496 K148.1@178.835,-42.491 K148.1@178.84,-42.496 ; K174.1@220.873,-134.802 220.873,-132.369 219.661,-131.157 219.661,-123.838 222.085,-121.414 222.085,-118.758 220.873,-117.546 K166.1@220.873,-111.971 ; K166.1@220.873,-111.971 K166.1@220.873,-111.729 ; K166.1@220.873,-111.729 K166.1@220.878,-111.729 ; K166.1@220.873,-111.729 K166.1@220.873,-111.724 ; K166.1@220.873,-111.724 222.125,-110.472 222.125,-95.72 220.978,-94.573 220.978,-86.048 222.125,-84.901 222.125,-82.737 221.504,-82.116 220.978,-82.116 219.661,-80.8 219.661,-72.577 220.873,-71.365 K150.1@220.873,-65.819 ; K166.1@220.873,-111.724 K166.1@220.878,-111.729 ; K150.1@220.873,-65.819 K150.1@220.873,-65.569 220.873,-63.136 219.701,-61.964 219.701,-59.685 222.085,-57.301 222.085,-49.525 220.873,-48.313 K146.1@220.873,-42.731
  Bottom Layer w0.3: K62.1@10.681,-180.957 9.469,-179.745 9.469,-167.986 8.846,-167.363 8.846,-163.259 10.681,-161.424 K54.1@10.681,-157.88 ; K50.1@10.721,-134.807 10.721,-135.896 18.491,-135.896 K51.1@18.491,-134.802 K52.1@26.287,-134.802 ; K64.1@26.287,-180.957 28.954,-183.625 69.213,-183.625 K61.1@71.88,-180.957 ; K49.1@71.92,-134.807 71.92,-136.09 72.388,-136.558 97.788,-136.558 98.183,-136.163 K87.1@98.183,-134.802 ; K72.1@105.384,-180.963 105.384,-182.204 106.297,-183.117 135.634,-183.117 136.571,-182.179 K69.1@136.571,-180.963 136.571,-180.5 138.529,-180.5 138.986,-180.957 K70.1@144.016,-180.957 148.969,-176.005 148.08,-175.116 148.207,-174.989 v1(148.588,-174.989) ; K77.1@136.571,-157.885 136.571,-159.177 144.016,-159.177 ; K78.1@144.016,-157.88 144.016,-159.177 ; K78.1@144.056,-157.885 144.056,-159.177 144.016,-159.177 ; v1(148.08,-165.591) 144.016,-161.527 144.016,-159.177 ; K136.1@178.835,-19.413 185.545,-19.413 189.216,-23.085 201.793,-23.085 205.377,-19.501 K133.1@205.377,-19.413 K134.1@213.063,-19.413 ; K189.1@213.103,-180.963 213.103,-179.56 220.873,-179.56 K190.1@220.873,-180.957 223.518,-178.313 223.518,-165.591 220.873,-162.946 K182.1@220.873,-157.88 ; K157.1@213.103,-88.626 213.103,-88.628 220.873,-88.628 K158.1@220.873,-88.621
Y0: K4.7 K8.7 L1.1 | length 222.2
  Mid w0.3: K8.7@33.208,-4.198 33.208,-6.616 34.42,-7.829 34.42,-10.525 38.34,-14.444 38.34,-82.328 38.153,-82.515 38.153,-168.571 40.713,-171.132 41.389,-171.132 47.912,-177.654 47.912,-178.285 48.263,-178.636 51.81,-178.636 56.186,-183.013 57.738,-183.013 L1.1@67.406,-192.681
  Signal Layer 2 w0.3: K4.7@18.491,-4.198 21.587,-4.198 23.162,-5.774 28.953,-5.774 30.528,-4.198 K8.7@33.208,-4.198
Y2: K3.7 K7.7 L1.2 | length 229.9
  Mid w0.3: K7.7@26.287,-4.198 27.112,-4.198 29.162,-2.149 34.675,-2.149 40.222,-7.694 40.222,-56.111 40.04,-56.293 40.04,-108.65 40.253,-108.862 40.253,-166.105 48.375,-174.226 51.672,-174.226 56.953,-179.507 57.612,-179.507 57.617,-179.513 57.652,-179.513 58.273,-180.133 58.273,-180.828 L1.2@67.436,-189.99
  Bottom Layer w0.3: K3.7@10.681,-4.198 16.45,-4.198 17.9,-5.648 19.082,-5.648 20.532,-4.198 K7.7@26.287,-4.198
Y4: K2.7 K6.7 L1.3 | length 225
  Mid w0.3: L1.3@67.406,-187.401 67.406,-186.635 64.383,-183.613 62.729,-183.613 55.849,-176.732 55.849,-175.078 54.243,-173.472 48.469,-173.472 42.658,-167.661 42.658,-164.264 41.65,-163.256 41.65,-148.276 42.658,-147.268 42.658,-141.658 42.416,-141.416 42.416,-138.406 42.275,-138.266 42.275,-137.645 42.416,-137.504 42.416,-110.238 42.25,-110.072 42.25,-101.253 42.658,-100.845 42.658,-93.529 41.896,-92.767 41.896,-56.427 42.67,-55.653 42.67,-12.97 49.011,-6.629 54.591,-6.629 K2.7@57.021,-4.198 62.353,-4.198 63.803,-5.648 64.986,-5.648 66.436,-4.198 K6.7@71.879,-4.198
Y6: K1.7 K5.7 L1.4 | length 271.3
  Mid w0.3: K1.7@50.099,-4.198 40.536,-4.198 37.869,-1.532 26.842,-1.532 25.075,-3.3 25.075,-5.502 25.222,-5.648 29.717,-5.648 32.617,-2.749 33.799,-2.749 39.44,-8.389 39.44,-108.898 39.653,-109.111 39.653,-155.698 39.622,-155.729 39.622,-169.191 40.962,-170.532 41.851,-170.532 49.142,-177.823 49.142,-178.036 52.058,-178.036 56.434,-182.413 58.222,-182.413 66.9,-191.091 67.891,-191.091 68.876,-190.106 68.876,-189.535 69.52,-188.89 70.431,-188.89 71.076,-189.535 71.076,-191.55 L1.4@69.946,-192.681
  Signal Layer 2 w0.3: K1.7@50.099,-4.198 50.099,-5.609 50.798,-6.307 63.498,-6.307 64.395,-5.41 K5.7@64.395,-4.198
Y8: K12.7 K20.7 L1.5 | length 245.9
  Mid w0.3: K12.7@10.666,-27.312 9.446,-28.532 9.446,-177.274 10.716,-178.544 12.85,-178.544 17.676,-183.37 54.862,-183.37 65.276,-193.784 67.892,-193.784 68.527,-193.149 68.527,-191.676 69.568,-190.635 69.568,-189.99 L1.5@69.976,-189.99
  Bottom Layer w0.3: K12.7@10.666,-27.312 16,-27.313 18.54,-24.773 31.836,-24.773 33.208,-26.144 K20.7@33.208,-27.276
Y10: K11.7 K19.7 L1.6 | length 330.6
  Mid w0.3: K19.7@26.287,-27.276 26.25,-27.312 K11.7@18.54,-27.312 18.54,-25.196 9.469,-16.125 9.469,-3.369 11.906,-0.932 71.503,-0.932 73.691,-3.121 73.691,-5.537 71.4,-7.829 49.508,-7.829 48.887,-8.449 48.887,-12.144 43.27,-17.761 43.27,-55.405 43.332,-55.467 43.332,-55.84 43.096,-56.076 43.096,-74.704 42.914,-74.886 42.914,-81.811 43.42,-82.317 43.42,-90.971 43.042,-91.348 43.042,-91.845 43.838,-92.641 43.838,-117.9 43.219,-118.518 43.219,-137.089 43.775,-137.645 43.775,-138.266 43.422,-138.62 43.422,-155.3 43.75,-155.628 43.75,-163.659 44.931,-164.84 45.266,-164.84 45.484,-165.058 45.706,-165.058 46.654,-166.006 46.654,-170.722 48.804,-172.872 50.939,-172.872 52.217,-171.594 54.062,-171.594 56.32,-173.853 57.9,-173.853 58.873,-174.825 58.873,-177.477 63.808,-182.413 64.958,-182.413 L1.6@69.946,-187.401
Y12: K10.7 K18.7 L1.7 | length 192.1
  Signal Layer 2 w0.3: K18.7@64.768,-27.312 64.768,-27.414 75.182,-37.828 v1(75.182,-172.194)
  Bottom Layer w0.3: K18.7@64.768,-27.312 K10.7@57.057,-27.313 ; L1.7@72.486,-192.681 72.486,-191.516 71.385,-190.416 71.385,-186.945 73.924,-184.407 73.924,-184.33 75.841,-182.413 83.76,-182.413 84.069,-182.103 84.069,-180.133 76.13,-172.194 v1(75.182,-172.194) ; K10.7@57.057,-27.313 K10.7@57.021,-27.276 57.021,-27.313 K10.7@57.057,-27.313
Y14: K9.7 K17.7 L1.8 | length 210.8
  Mid w0.3: K9.7@50.099,-27.276 50.099,-30.315 48.887,-31.527 48.887,-33.186 51.351,-35.65 51.351,-44.937 48.887,-47.401 48.887,-51.981 43.696,-57.173 43.696,-79.765 43.514,-79.947 43.514,-81.562 44.02,-82.068 44.02,-91.22 43.642,-91.597 44.438,-92.392 44.438,-118.987 43.819,-119.605 43.819,-120.724 44.022,-120.926 44.022,-137.043 44.375,-137.396 44.375,-138.515 44.022,-138.868 44.022,-155.051 44.35,-155.379 44.35,-163.075 45.614,-164.34 46.423,-164.34 48.887,-166.804 48.887,-171.652 49.508,-172.272 50.69,-172.272 51.968,-170.994 54.31,-170.994 56.568,-173.253 58.149,-173.253 61.423,-176.526 61.423,-177.477 63.453,-179.508 65.021,-179.508 71.385,-185.872 71.385,-188.86 L1.8@72.516,-189.99
  Bottom Layer w0.3: K9.7@50.099,-27.276 54.979,-27.276 56.466,-28.762 70.683,-28.762 K17.7@72.133,-27.312
Y16: K16.7 K24.7 L1.9 | length 226.3
  Signal Layer 2 w0.3: K16.7@33.208,-50.354 33.208,-50.351 26.287,-50.351 K24.7@26.287,-50.354 23.829,-47.896 10.163,-47.896 7.526,-50.534 7.526,-154.216 9.739,-156.43 11.307,-156.43 12.34,-157.462 16.928,-157.462 17.279,-157.111 17.279,-157.05 17.9,-156.43 19.117,-156.43 26.98,-164.293 33.799,-164.293 41.233,-171.726 41.233,-171.948 41.908,-172.622 43.432,-172.622 44.223,-173.413 44.223,-174.716 48.414,-178.908 52.077,-178.908 66.95,-193.781 68.32,-193.781 68.578,-194.039 75.405,-194.039 76.126,-193.318 76.126,-192.225 74.991,-191.091 74.6,-191.091 73.956,-190.446 73.956,-189.875 72.486,-188.405 L1.9@72.486,-187.401
Y18: K15.7 K23.7 L1.10 | length 264.2
  Signal Layer 2 w0.3: 8.309,-142.147 8.309,-154.151 9.988,-155.83 19.366,-155.83 19.966,-156.43 26.913,-156.43 27.539,-157.055 27.539,-157.183 ; 8.309,-142.147 9.841,-140.615 9.841,-136.852 8.309,-135.32 8.309,-119.069 9.841,-117.537 9.841,-113.774 8.869,-112.802 8.869,-85.478 8.309,-84.918 8.309,-50.599 10.004,-48.904 17.041,-48.904 K23.7@18.491,-50.354 ; L1.10@75.026,-192.681 73.925,-191.58 67.861,-191.58 65.602,-191.58 51.374,-177.352 50.73,-177.352 47.708,-177.352 44.823,-174.467 44.823,-173.165 43.68,-172.022 42.378,-172.022 ; 27.539,-157.183 42.378,-172.022 ; 27.539,-157.183 42.378,-172.022
  Bottom Layer w0.3: K23.7@18.491,-50.354 18.491,-49.004 19.609,-47.887 55.903,-47.887 57.021,-49.004 K15.7@57.021,-50.354
Y20: K14.7 K22.7 L1.11 | length 202.1
  Mid w0.3: K14.7@50.099,-50.354 49.861,-50.592 49.861,-51.856 44.46,-57.257 44.46,-75.223 44.909,-75.673 44.909,-79.4 44.114,-80.195 44.114,-81.314 44.62,-81.82 44.62,-91.726 45.038,-92.144 45.038,-98.988 45.058,-99.008 45.058,-101.617 45.038,-101.637 45.038,-117.403 45.058,-117.423 45.058,-119.216 44.419,-119.854 44.419,-120.475 44.622,-120.677 44.622,-136.794 44.975,-137.148 44.975,-138.763 44.622,-139.117 44.622,-140.228 45.706,-141.312 45.706,-143.517 45.058,-144.165 45.058,-148.263 44.622,-148.699 44.622,-154.803 44.95,-155.131 44.95,-158.219 51.468,-164.736 51.468,-165.102 55.738,-169.373 57.612,-169.373 58.233,-169.993 58.233,-172.59 58.295,-172.653 58.397,-172.653 62.023,-176.278 62.023,-177.229 63.346,-178.552 64.918,-178.552 72.666,-186.3 72.941,-186.3 73.586,-186.945 73.586,-187.516 75.056,-188.986 L1.11@75.056,-189.99
  Signal Layer 2 w0.3: K22.7@10.681,-50.354 10.681,-51.814 11.428,-52.56 49.083,-52.56 50.099,-51.544 K14.7@50.099,-50.354
Y22: K13.7 K21.7 L1.12 | length 169.8
  Mid w0.3: K13.7@71.879,-50.354 K21.7@64.395,-50.354 64.395,-52.772 63.183,-53.984 63.183,-56.433 45.96,-73.656 45.96,-79.198 44.714,-80.444 44.714,-81.065 45.22,-81.571 45.22,-91.477 45.638,-91.895 45.638,-96.632 45.658,-96.652 45.658,-101.866 45.638,-101.886 45.638,-117.154 45.92,-117.436 45.92,-118.79 46.544,-119.415 46.544,-123.318 45.222,-124.64 45.222,-136.545 45.575,-136.899 45.575,-139.012 45.222,-139.365 45.222,-139.979 46.306,-141.063 46.306,-144.192 45.658,-144.84 45.658,-148.511 45.222,-148.947 45.222,-154.554 45.55,-154.882 45.55,-156.533 52.068,-163.05 52.068,-164.853 55.987,-168.773 57.86,-168.773 58.833,-169.745 58.833,-171.618 62.623,-175.408 62.623,-176.98 63.595,-177.952 65.167,-177.952 72.915,-185.7 73.325,-185.7 L1.12@75.026,-187.401
Y24: K28.7 K36.7 L1.13 | length 274.4
  Signal Layer 2 w0.3: K28.7@64.395,-73.432 64.395,-74.6 63.498,-75.497 33.653,-75.497 33.208,-75.052 K36.7@33.208,-73.432 31.758,-71.982 25.695,-71.982 19.082,-71.982 10.09,-71.982 8.909,-73.162 8.909,-84.669 9.53,-85.29 9.881,-85.642 18.884,-85.642 24.544,-91.302 27.055,-91.302 31.996,-96.243 31.996,-97.339 32.617,-97.959 48.659,-97.959 49.259,-98.559 51.565,-98.559 53.022,-97.102 53.889,-97.102 53.951,-97.165 54.324,-97.165 56.429,-95.059 60.903,-95.059 69.594,-103.75 69.594,-119.87 66.807,-122.657 66.807,-127.07 67.74,-128.004 67.74,-143.906 65.731,-145.915 63.335,-145.915 62.583,-146.667 62.583,-148.215 60.023,-150.775 56.221,-150.775 53.43,-153.566 53.43,-159.986 52.281,-161.135 50.6,-161.135 48.534,-163.202 48.534,-164.418 48.287,-164.665 48.287,-166.82 49.259,-167.792 56.002,-167.792 56.524,-168.314 61.412,-168.314 61.87,-168.773 65.234,-168.773 66.207,-169.745 66.207,-170.593 69.466,-173.853 72.759,-173.853 73.317,-174.41 74.166,-174.41 ; v1(77.468,-184.132) 77.468,-182.12 ; 74.166,-174.41 74.331,-174.576 ; 74.166,-174.41 74.331,-174.576 ; 74.331,-174.576 74.331,-178.788 77.468,-181.924 ; 77.468,-182.12 77.566,-182.022 77.468,-181.924 ; 77.468,-182.12 77.468,-181.924
  Bottom Layer w0.3: v1(77.468,-184.132) 77.468,-185.747 ; 76.465,-190.416 76.465,-186.945 77.468,-185.943 ; 76.465,-190.416 77.566,-191.516 L1.13@77.566,-192.681 76.465,-191.58 76.465,-190.416 ; 77.468,-185.943 77.566,-185.845 77.468,-185.747 ; 77.468,-185.943 77.468,-185.747
Y26: K27.7 K35.7 L1.14 | length 180
  Mid w0.3: K27.7@57.021,-73.432 55.571,-71.982 49.508,-71.982 46.734,-74.756 46.734,-79.948 47.23,-80.444 47.23,-81.065 46.722,-81.573 46.722,-97.662 46.258,-98.126 46.258,-102.114 46.238,-102.134 46.238,-102.909 46.722,-103.393 46.722,-118.379 47.158,-118.815 47.158,-124.903 45.984,-126.077 45.984,-136.459 46.175,-136.651 46.175,-139.701 45.984,-139.893 46.906,-140.815 46.906,-151.633 55.209,-159.936 55.209,-166.954 56.427,-168.173 58.109,-168.173 59.433,-169.496 59.433,-170.768 63.223,-174.558 63.223,-176.732 63.843,-177.352 65.622,-177.352 72.16,-183.89 72.796,-183.89 73.236,-184.33 73.236,-184.966 73.37,-185.1 74.281,-185.1 76.126,-186.945 76.126,-188.52 L1.14@77.596,-189.99
  Bottom Layer w0.3: K35.7@26.287,-73.432 26.287,-72.347 26.668,-71.966 42.177,-71.966 44.119,-73.908 47.686,-73.908 49.532,-75.755 55.721,-75.755 57.021,-74.455 K27.7@57.021,-73.432
Y28: K26.7 K34.7 L1.15 | length 156.5
  Mid w0.3: K26.7@50.099,-73.432 50.099,-74.988 48.385,-76.703 47.947,-76.703 47.508,-77.142 47.508,-79.541 48.5,-80.533 48.5,-82.335 47.762,-83.073 47.762,-85.637 47.992,-85.867 47.992,-125.105 46.746,-126.351 46.746,-126.785 47.496,-127.535 47.496,-137.142 48.287,-137.934 48.287,-148.932 51.351,-151.995 51.351,-154.628 55.809,-159.085 55.809,-166.572 56.429,-167.192 57.977,-167.192 61.983,-171.198 61.983,-172.149 64.286,-174.453 65.898,-174.453 70.953,-179.508 72.506,-179.508 73.131,-180.133 73.131,-182.966 L1.15@77.566,-187.401
  Signal Layer 2 w0.3: K26.7@50.099,-73.432 50.099,-73.185 51.788,-73.185 53.566,-71.407 71.118,-71.407 71.88,-72.169 K34.7@71.88,-73.432